# Altium PCB F407ZGT6.PcbDoc (part 5 of 7)
Units mil, origin at the board's own origin, x right, y up, seen from the top; angles counter-clockwise.
Board outline 4380 x 3940 mil, 2 copper layers (Top Layer, Bottom Layer); 88 components, 146 nets, 552 pads, 268 vias.
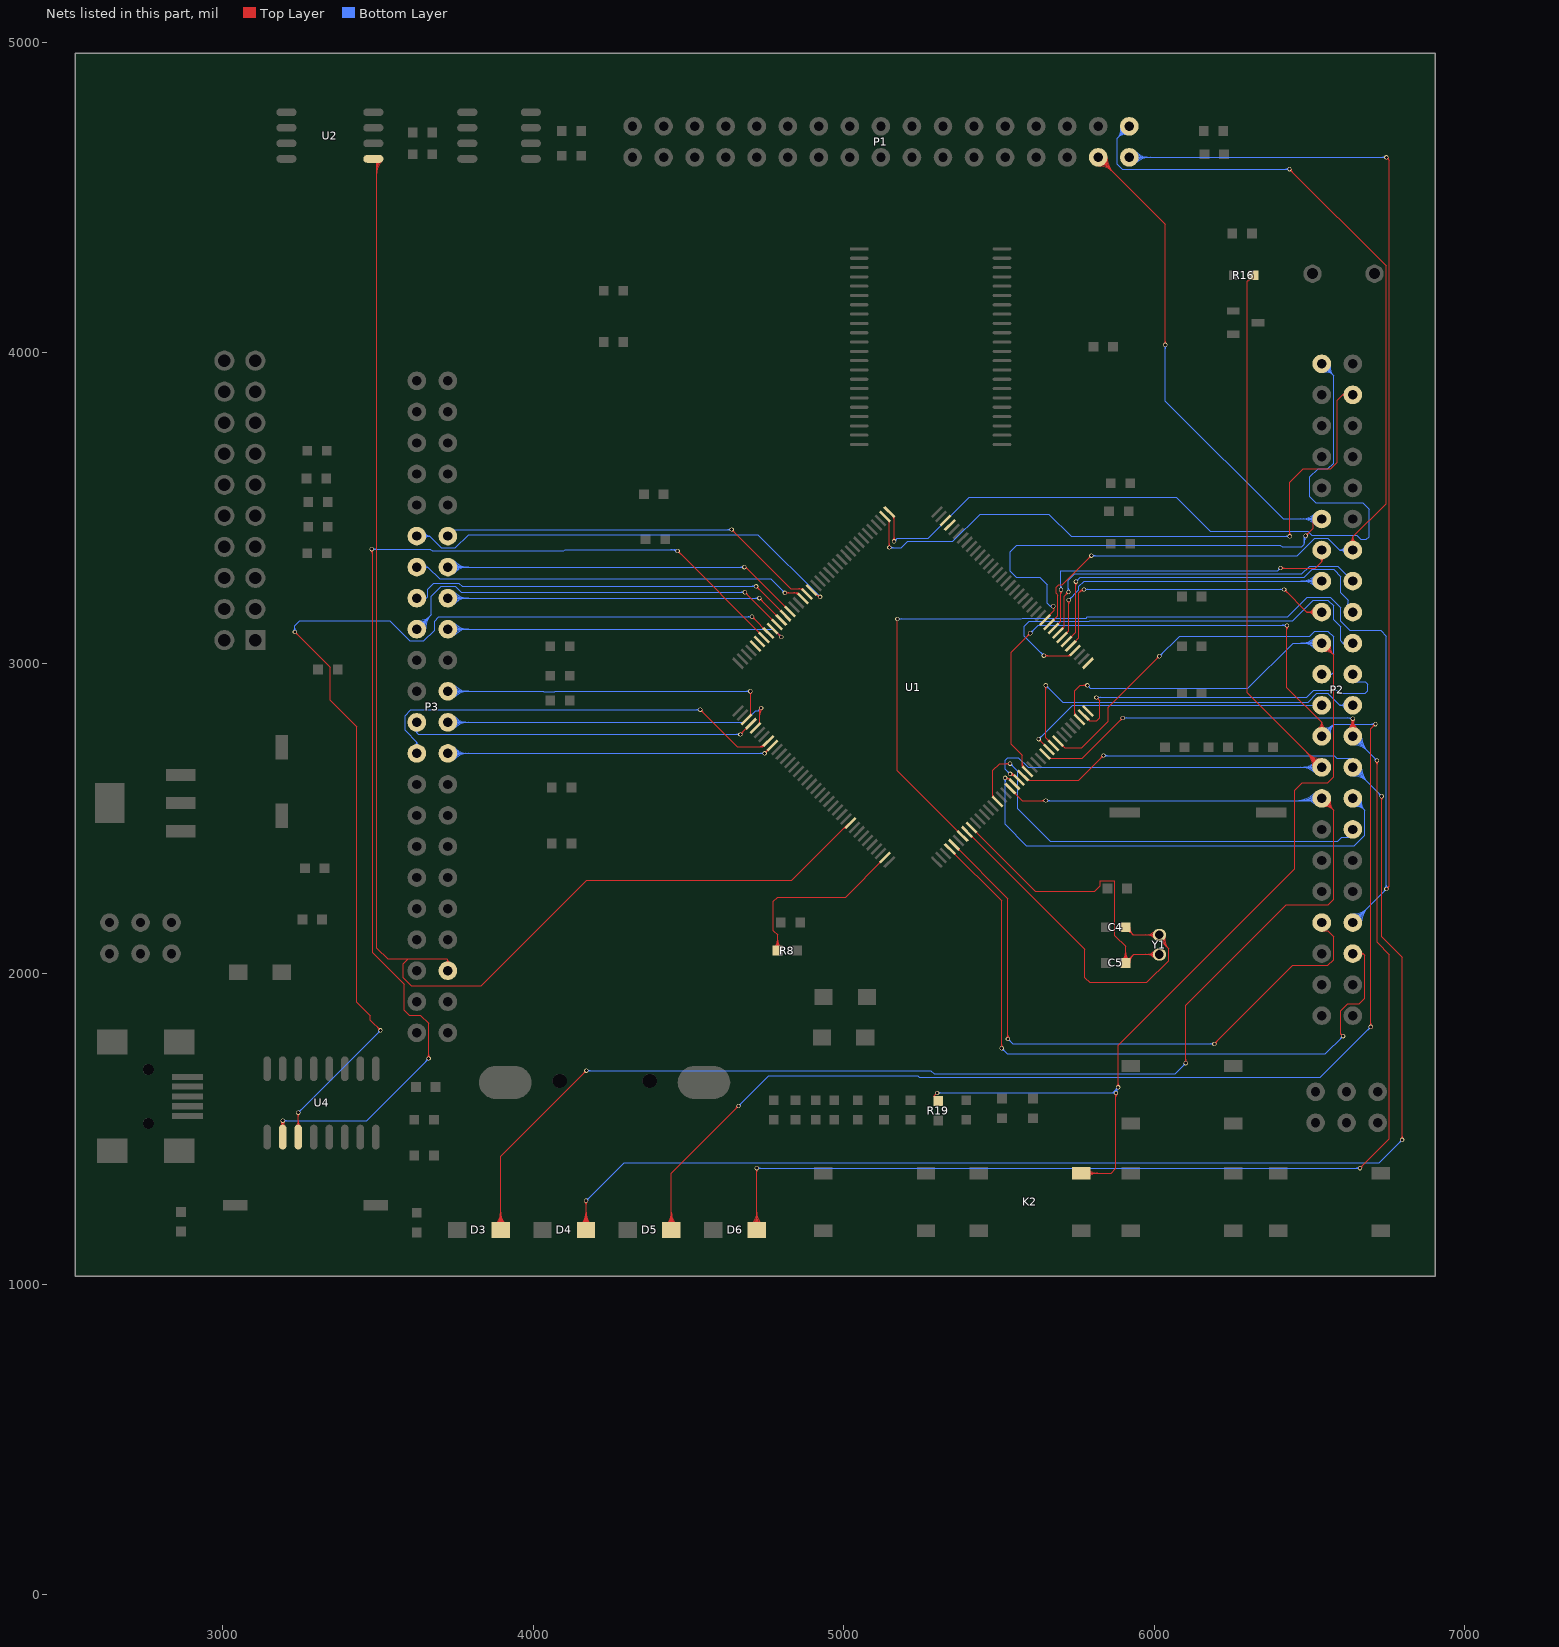
[diagram p5: the nets of this part, all layers, seen from the top]

## Via types
v1: diameter 14, hole 10, Top Layer to Bottom Layer, 265 vias
v2: diameter 150, hole 150, Top Layer to Bottom Layer, 3 vias

## Nets (pads, with @x,y where several pads share a name; then routed paths per layer and width w, separated by ;. In a path a pad name is that pad's centre, name@x,y a point inside that pad or via, vN(x,y) a via of type N, cw(c..) or ccw(c..) an arc to the next point about the centre after c; other vN are vias at no path point) (continued)
NetR8_2: R8.2 U1.143 | length 680.1
  Top Layer w4: R8.2@4777.29,2084.72 ccw(c4753.82,2108.19) 4787.01,2108.19 ccw(c4820.2,2108.19) R8.2@4796.73,2084.72 ; R8.2@4780.12,2081.89 ccw(c4763.47,2098.53) 4787.01,2098.53 ccw(c4810.54,2098.53) R8.2@4793.9,2081.89 ; R8.2@4787.01,2075 4787.01,2125 4773,2139.01 4773,2233 4787,2247 5006.05,2247 U1.143@5132.97,2373.92 ; U1.143@5117,2360.28 cw(c5111.37,2360.28) 5115.35,2356.3 cw(c5119.33,2352.32) U1.143@5119.33,2357.95
NRF_CE: P3.34 U1.91 | length 1581.4
  Top Layer w4: U1.91@4896.34,3236.92 4919.26,3214 v1(4924,3214) ; U1.91@4907.37,3225.89 ccw(c4924,3242.51) v1@4924,3219 ; U1.91@4909.98,3220.95 cw(c4909.98,3215.32) 4913.96,3219.3 cw(c4917.94,3223.28) U1.91@4912.31,3223.28 ; 4914.2,3219.06 ccw(c4924,3228.86) v1@4924,3215
  Bottom Layer w4: P3.34@3625,3410 3666,3410 ; P3.34@3647.35,3401.27 cw(c3660.14,3396.27) 3660.14,3410 cw(c3660.14,3423.73) P3.34@3647.35,3418.73 ; P3.34@3651.08,3399.81 cw(c3666,3393.98) 3666,3410 ; P3.34@3651.08,3420.19 ccw(c3666,3426.02) 3666,3410 ; v1@4919,3214 ccw(c4906.93,3214) 4915.46,3222.54 ccw(c4924,3231.07) v1@4924,3219 ; v1(4924,3214) 4723,3415 3792,3415 3749,3372 3704,3372 3666,3410
NRF_CS: P3.33 U1.92 | length 1328.5
  Top Layer w4: v1@4639,3426 cw(c4639,3413.93) 4647.54,3422.46 cw(c4656.07,3431) v1@4644,3431 ; v1(4639,3431) 4830,3240 4865.42,3240 ; 4855.05,3240 cw(c4855.05,3222.91) U1.92@4867.13,3234.99 ; 4864.7,3240 cw(c4864.7,3232.57) U1.92@4869.96,3237.82 ; U1.92@4866.47,3236.94 ccw(c4862.83,3237.41) 4865.42,3240 ; U1.92@4868.48,3238.95 cw(c4868.01,3242.59) 4865.42,3240 ; U1.92@4882.42,3223 4865.42,3240
  Bottom Layer w4: P3.33@3725,3410 3725,3431 v1(4639,3431) ; v1@4635.46,3427.46 ccw(c4626.93,3418.93) 4626.93,3431 ccw(c4626.93,3443.07) v1@4635.46,3434.54
NRF_IRQ: P3.32 U1.93 | length 1401.1
  Top Layer w4: v1(4810.58,3227) 4850.58,3227 U1.93@4868.5,3209.08 ; v1@4814.12,3223.46 cw(c4822.65,3214.93) 4822.65,3227 cw(c4822.65,3239.07) v1@4814.12,3230.54 ; 4838.91,3227 cw(c4838.91,3206.78) U1.93@4853.21,3221.08 ; 4848.57,3227 cw(c4848.57,3216.43) U1.93@4856.04,3223.91 ; U1.93@4852.53,3222.72 ccw(c4846.9,3222.72) 4850.88,3226.7 ccw(c4854.86,3230.68) U1.93@4854.86,3225.06
  Bottom Layer w4: P3.32@3625,3310 3661,3310 ; P3.32@3648.26,3304.09 cw(c3655.86,3302.16) 3655.86,3310 cw(c3655.86,3317.84) P3.32@3648.26,3315.91 ; P3.32@3652.14,3303.11 cw(c3661,3300.86) 3661,3310 ; P3.32@3652.14,3316.89 ccw(c3661,3319.14) 3661,3310 ; v1@4805.58,3227 ccw(c4793.51,3227) 4802.05,3235.54 ccw(c4810.58,3244.07) v1@4810.58,3232 ; v1(4810.58,3227) 4765.58,3272 3699,3272 3661,3310
PA0: K2.3 P2.26 R19.1 U1.34 | length 4688.7
  Top Layer w4: v1@5296,1616 cw(c5283.93,1616) 5292.46,1607.46 cw(c5301,1598.93) v1@5301,1611 ; v1(5301,1616) 5290,1605 R19.1@5305,1590 ; 5745,2840.3 ccw(c5753.01,2840.3) U1.34@5747.35,2834.63 ; U1.34@5759.34,2819.34 5745,2833.68 5745,2912 5762,2929 v1(5785,2929) ; K2.3@5765.35,1357.52 5861.52,1357.52 5877,1373 v1(5877,1616) ; v1@5781.46,2925.46 ccw(c5772.93,2916.93) 5772.93,2929 ccw(c5772.93,2941.07) v1@5781.46,2932.54 ; K2.3@5782.04,1350.67 cw(c5798.58,1334.14) 5798.58,1357.52 cw(c5798.58,1380.9) K2.3@5782.04,1364.37 ; K2.3@5784.87,1347.84 cw(c5808.23,1324.48) 5808.23,1357.52 cw(c5808.23,1390.56) K2.3@5784.87,1367.2 ; K2.3@5787.7,1345.01 cw(c5817.89,1314.82) 5817.89,1357.52 cw(c5817.89,1400.22) K2.3@5787.7,1370.03 ; v1@5873.46,1612.46 cw(c5864.93,1603.93) 5877,1603.93 cw(c5889.07,1603.93) v1@5880.54,1612.46 ; v1@5880.46,1637.54 ccw(c5871.93,1646.07) 5884,1646.07 ccw(c5896.07,1646.07) v1@5887.54,1637.54 ; v1(5884,1634) 5884,1770 6453,2339 6453,2592 6477,2616 6560,2616 6578,2634 6578,3027 ; P2.26@6540,3065 6578,3027 ; P2.26@6542.79,3049.25 cw(c6546.53,3028.11) 6561.71,3043.29 cw(c6576.89,3058.47) P2.26@6555.75,3062.21 ; P2.26@6543.49,3045.31 cw(c6548.17,3018.88) 6567.14,3037.86 cw(c6586.12,3056.83) P2.26@6559.69,3061.51 ; P2.26@6544.19,3041.37 cw(c6549.8,3009.66) 6572.57,3032.43 cw(c6595.34,3055.2) P2.26@6563.63,3060.81 ; P2.26@6544.88,3037.43 cw(c6551.43,3000.44) 6578,3027 ; P2.26@6567.57,3060.12 ccw(c6604.56,3053.57) 6578,3027
  Bottom Layer w4: v1(5301,1616) 5866,1616 ; v1@5304.54,1612.46 cw(c5313.07,1603.93) 5313.07,1616 cw(c5313.07,1628.07) v1@5304.54,1619.54 ; v1@5785,2924 cw(c5785,2911.93) 5793.54,2920.46 cw(c5802.07,2929) v1@5790,2929 ; v1(5785,2929) 5795,2919 6302,2919 6448,3065 P2.26@6540,3065 ; 5870.75,1612.85 cw(c5878.01,1616.51) 5872.26,1622.26 ; v1@5873.23,1612.71 ccw(c5866,1606.4) 5866,1616 ; v1@5873.23,1619.29 cw(c5866,1625.6) 5866,1616 ; v1@5874.32,1614.65 cw(c5883.22,1619.13) 5876.17,1626.17 ; 5876.62,1624.09 cw(c5885.22,1619.12) v1@5884.41,1629.02 ; v1(5877,1616) 5866,1616 ; v1@5877.89,1616.45 cw(c5888.42,1621.75) v1@5880.09,1630.09 ; 5878.45,1627.26 ccw(c5872.23,1630.85) v1@5879.17,1632.71 ; v1@5879,1634 cw(c5866.93,1634) 5875.46,1625.46 cw(c5884,1616.93) v1@5884,1629 ; v1@5881.47,1618.25 cw(c5893.63,1624.37) v1(5884,1634) 5866,1616 ; P2.26@6520.2,3045.2 ccw(c6472.4,2997.4) 6472.4,3065 ccw(c6472.4,3132.6) P2.26@6520.2,3084.8 ; P2.26@6523.03,3048.03 ccw(c6482.06,3007.06) 6482.06,3065 ccw(c6482.06,3122.94) P2.26@6523.03,3081.97 ; P2.26@6525.86,3050.86 ccw(c6491.72,3016.72) 6491.72,3065 ccw(c6491.72,3113.28) P2.26@6525.86,3079.14 ; P2.26@6528.69,3053.69 ccw(c6501.37,3026.37) 6501.37,3065 ccw(c6501.37,3103.63) P2.26@6528.69,3076.31
PA1: P2.23 U1.35 | length 1168.1
  Top Layer w4: U1.35@5773.26,2833.26 5791.52,2815 5815,2815 5825,2825 5825,2879 v1(5814,2890) ; U1.35@5786.9,2817.29 cw(c5786.9,2811.66) 5790.88,2815.64 cw(c5794.86,2819.62) U1.35@5789.23,2819.62 ; v1@5814,2885 cw(c5814,2872.93) 5822.54,2881.46 cw(c5831.07,2890) v1@5819,2890
  Bottom Layer w4: v1(5814,2890) 6492,2890 6515,2913 6588,2913 6598,2903 6680,2903 6688,2911 6688,2932 6680,2940 6640,2940 P2.23@6640,2965 ; v1@5817.54,2886.46 cw(c5826.07,2877.93) 5826.07,2890 cw(c5826.07,2902.07) v1@5817.54,2893.54
PA2: U1.36
PA3: U1.37
PA4: P2.25 U1.40 | length 1507.5
  Top Layer w4: v1(5645,3025) 5728.37,3025 ; v1@5648.54,3021.46 cw(c5657.07,3012.93) 5657.07,3025 cw(c5657.07,3037.07) v1@5648.54,3028.54 ; 5717.92,3025 ccw(c5717.92,3042.27) U1.40@5730.13,3030.06 ; 5727.58,3025 ccw(c5727.58,3032.61) U1.40@5732.96,3027.23 ; U1.40@5729.46,3028.14 cw(c5725.67,3027.7) 5728.37,3025 ; U1.40@5731.51,3026.09 ccw(c5731.07,3022.3) 5728.37,3025 ; U1.40@5745.42,3042.05 5728.37,3025
  Bottom Layer w4: v1@5640,3025 ccw(c5627.93,3025) 5636.46,3033.54 ccw(c5645,3042.07) v1@5645,3030 ; v1(5645,3025) 5582,3088 5582,3120 5597.94,3135.94 5790.94,3135.94 5792,3137 6446,3137 6512,3203 6560,3203 6578,3185 6578,3141 6601,3118 6601,3072 6608,3065 ; P2.25@6612.25,3061.28 ccw(c6608,3060.72) 6608,3065 ; P2.25@6612.25,3068.72 cw(c6608,3069.28) 6608,3065 ; P2.25@6640,3065 6608,3065
PA5: P2.28 U1.41 | length 1240.4
  Top Layer w4: U1.41@5731.5,3055.97 5758,3082.47 5758,3228 ; U1.41@5745.14,3071.94 ccw(c5745.14,3077.57) 5749.12,3073.59 ccw(c5753.1,3069.61) U1.41@5747.47,3069.61 ; 5763.63,3233.63 cw(c5772.11,3225.15) v1@5773.85,3237.01 ; v1@5773.27,3233.05 ccw(c5770.66,3215.34) 5758,3228 ; v1(5774,3238) 5768,3238 5758,3228 ; v1@6419,3233 cw(c6419,3220.93) 6427.54,3229.46 cw(c6436.07,3238) v1@6424,3238 ; v1(6419,3238) 6492,3165 ; P2.28@6515.63,3151.22 ccw(c6492,3137.86) 6492,3165 ; P2.28@6515.63,3178.78 cw(c6492,3192.14) 6492,3165 ; P2.28@6519.11,3153.19 ccw(c6498.86,3141.74) 6498.86,3165 ccw(c6498.86,3188.26) P2.28@6519.11,3176.81 ; P2.28@6522.59,3155.16 ccw(c6505.72,3145.61) 6505.72,3165 ccw(c6505.72,3184.39) P2.28@6522.59,3174.84 ; P2.28@6540,3165 6492,3165
  Bottom Layer w4: v1(5774,3238) v1(6419,3238) ; v1@5777.54,3234.46 cw(c5786.07,3225.93) 5786.07,3238 cw(c5786.07,3250.07) v1@5777.54,3241.54 ; v1@6415.46,3234.46 ccw(c6406.93,3225.93) 6406.93,3238 ccw(c6406.93,3250.07) v1@6415.46,3241.54
PA6: P2.27 U1.42 | length 1284.6
  Top Layer w4: U1.42@5717.58,3069.89 5748,3100.31 v1(5748,3263.35) ; U1.42@5731.22,3085.86 ccw(c5731.22,3091.49) 5735.2,3087.51 ccw(c5739.18,3083.53) U1.42@5733.55,3083.53 ; v1@5744.46,3259.81 cw(c5735.93,3251.28) 5748,3251.28 cw(c5760.07,3251.28) v1@5751.54,3259.81
  Bottom Layer w4: v1(5748,3263.35) 5761.65,3277 6483,3277 6509,3303 6578,3303 6602,3279 6602,3227 6625,3204 6625,3165 P2.27@6640,3165 ; v1@5748,3268.35 ccw(c5748,3280.42) 5756.54,3271.88 ccw(c5765.07,3263.35) v1@5753,3263.35 ; P2.27@6620.2,3184.8 ccw(c6608.62,3196.38) 6625,3196.38
PA7: P2.30 U1.43 | length 1356.2
  Top Layer w4: U1.43@5703.66,3083.81 5725,3105.15 v1(5725,3204) ; U1.43@5717.3,3099.78 ccw(c5717.3,3105.41) 5721.28,3101.43 ccw(c5725.26,3097.45) U1.43@5719.63,3097.45 ; v1@5721.46,3200.46 cw(c5712.93,3191.93) 5725,3191.93 cw(c5737.07,3191.93) v1@5728.54,3200.46
  Bottom Layer w4: v1(5725,3204) 5758,3237 5758,3248 5775,3265 P2.30@6540,3265 ; v1@5725,3209 ccw(c5725,3221.07) 5733.54,3212.54 ccw(c5742.07,3204) v1@5730,3204 ; P2.30@6520.2,3245.2 ccw(c6472.4,3197.4) 6472.4,3265 ccw(c6472.4,3332.6) P2.30@6520.2,3284.8 ; P2.30@6523.03,3248.03 ccw(c6482.06,3207.06) 6482.06,3265 ccw(c6482.06,3322.94) P2.30@6523.03,3281.97 ; P2.30@6525.86,3250.86 ccw(c6491.72,3216.72) 6491.72,3265 ccw(c6491.72,3313.28) P2.30@6525.86,3279.14 ; P2.30@6528.69,3253.69 ccw(c6501.37,3226.37) 6501.37,3265 ccw(c6501.37,3303.63) P2.30@6528.69,3276.31
PA8: P3.27 U1.100 | length 1501.8
  Top Layer w4: U1.100@4771.06,3111.65 4772.35,3111.65 v1(4799,3085) ; U1.100@4784.7,3095.68 cw(c4784.7,3086.94) 4790.88,3093.12 ; v1@4794,3085 ccw(c4781.93,3085) 4790.46,3093.54 ccw(c4799,3102.07) v1@4799,3090
  Bottom Layer w4: P3.27@3725,3110 4774,3110 v1(4799,3085) ; P3.27@3736.31,3098.69 cw(c3763.63,3071.37) 3763.63,3110 cw(c3763.63,3148.63) P3.27@3736.31,3121.31 ; P3.27@3739.14,3095.86 cw(c3773.28,3061.72) 3773.28,3110 cw(c3773.28,3158.28) P3.27@3739.14,3124.14 ; P3.27@3741.97,3093.03 cw(c3782.94,3052.06) 3782.94,3110 cw(c3782.94,3167.94) P3.27@3741.97,3126.97 ; P3.27@3744.8,3090.2 cw(c3792.6,3042.4) 3792.6,3110 cw(c3792.6,3177.6) P3.27@3744.8,3129.8 ; v1@4794,3085 ccw(c4781.93,3085) 4790.46,3093.54 ccw(c4799,3102.07) v1@4799,3090
PA9: U1.101 U4.3 | length 3722
  Top Layer w4: v1@3232,3096 cw(c3232,3083.93) 3240.54,3092.46 cw(c3249.07,3101) v1@3237,3101 ; v1(3232,3101) 3346,2987 3346,2881 3431,2796 3431,1909 3475.74,1864.26 3475.74,1850 v1(3508.03,1817.71) ; U4.3@3235.93,1509.07 ccw(c3218.86,1526.14) 3243,1526.14 ccw(c3267.14,1526.14) U4.3@3250.07,1509.07 ; U4.3@3238.76,1506.24 ccw(c3228.51,1516.49) 3243,1516.49 ccw(c3257.49,1516.49) U4.3@3247.24,1506.24 ; v1@3239.46,1549.14 cw(c3230.93,1540.6) 3243,1540.6 cw(c3255.07,1540.6) v1@3246.54,1549.14 ; U4.3@3243,1474 v1(3243,1552.67) ; v1@3503.03,1817.71 ccw(c3490.96,1817.71) 3499.5,1826.24 ccw(c3508.03,1834.78) v1@3508.03,1822.71 ; v1@4704.87,3145 cw(c4704.87,3132.93) 4713.41,3141.46 cw(c4721.94,3150) v1@4709.87,3150 ; v1(4704.87,3150) U1.101@4757.14,3097.73 ; U1.101@4741.17,3111.37 ccw(c4735.55,3111.37) 4739.52,3115.35 ccw(c4743.5,3119.33) U1.101@4743.5,3113.7
  Bottom Layer w4: v1@3228.46,3104.54 ccw(c3219.93,3113.07) 3232,3113.07 ccw(c3244.07,3113.07) v1@3235.54,3104.54 ; v1(3232,3101) 3232,3121 3248,3137 3538,3137 3603,3072 3647,3072 3682,3107 3682,3136 3696,3150 v1(4704.87,3150) ; v1(3243,1552.67) v1(3508.03,1817.71) ; v1@3243,1557.67 ccw(c3243,1569.74) 3251.54,1561.21 ccw(c3260.07,1552.67) v1@3248,1552.67 ; v1@3503.03,1817.71 cw(c3490.96,1817.71) 3499.5,1809.17 cw(c3508.03,1800.63) v1@3508.03,1812.71 ; v1@4701.34,3146.46 ccw(c4692.8,3137.93) 4692.8,3150 ccw(c4692.8,3162.07) v1@4701.34,3153.54
PA10: U1.102 U4.2 | length 4010.4
  Top Layer w4: U4.2@3185.93,1509.07 ccw(c3168.86,1526.14) 3193,1526.14 ccw(c3217.14,1526.14) U4.2@3200.07,1509.07 ; v1@3188.67,1524.5 cw(c3177.56,1518.09) 3189.95,1514.76 ; U4.2@3188.76,1506.24 ccw(c3178.51,1516.49) 3193,1516.49 ccw(c3207.49,1516.49) U4.2@3197.24,1506.24 ; v1@3189.46,1523.46 cw(c3180.93,1514.93) 3193,1514.93 cw(c3205.07,1514.93) v1@3196.54,1523.46 ; 3190.23,1515.8 cw(c3201.16,1512.87) v1@3195.5,1522.67 ; v1@3190.5,1522.67 cw(c3184.84,1512.87) 3195.77,1515.8 ; U4.2@3193,1474 v1(3193,1527) ; 3196.05,1514.76 cw(c3208.44,1518.09) v1@3197.33,1524.5 ; v1@3476.46,3364.46 cw(c3460.69,3348.69) 3483,3348.69 ; v1@3479.29,3367.29 cw(c3470.34,3358.34) 3483,3358.34 ; v1(3480,3368) 3483,3365 3483,2067 3584,1966 3584,1883 3600,1867 3636,1867 3663,1840 v1(3663,1727) ; v1@3659.46,1730.54 ccw(c3650.93,1739.07) 3663,1739.07 ccw(c3675.07,1739.07) v1@3666.54,1730.54 ; v1@4465.03,3357 cw(c4465.03,3344.93) 4473.57,3353.46 cw(c4482.1,3362) v1@4470.03,3362 ; v1(4465.03,3362) U1.102@4743.22,3083.81 ; U1.102@4727.25,3097.45 ccw(c4721.63,3097.45) 4725.6,3101.43 ccw(c4729.58,3105.41) U1.102@4729.58,3099.78
  Bottom Layer w4: v1(3193,1527) 3463,1527 v1(3663,1727) ; v1@3196.54,1523.46 cw(c3205.07,1514.93) 3205.07,1527 cw(c3205.07,1539.07) v1@3196.54,1530.54 ; v1(3480,3368) 3668,3368 3674,3362 4098.92,3362 4103.06,3366.14 4460.89,3366.14 v1(4465.03,3362) ; v1@3483.54,3364.46 cw(c3492.07,3355.93) 3492.07,3368 cw(c3492.07,3380.07) v1@3483.54,3371.54 ; v1@3658,1727 cw(c3645.93,1727) 3654.46,1718.46 cw(c3663,1709.93) v1@3663,1722 ; 4442.96,3366.14 cw(c4442.96,3339.93) v1@4461.5,3358.46 ; 4452.62,3366.14 cw(c4452.62,3349.59) v1@4464.32,3361.29
PA11: U1.103
PA12: U1.104
PB0: P1.34 P2.31 U1.46 | length 3734.3
  Top Layer w4: U1.46@5661.9,3125.57 5690,3153.66 5690,3219 5684,3225 5684,3245.38 5692.4,3253.79 5704.79,3253.79 v1(5798,3347) ; U1.46@5675.55,3141.54 ccw(c5675.55,3147.17) 5679.52,3143.19 ccw(c5683.5,3139.21) U1.46@5677.88,3139.21 ; v1@5793,3347 cw(c5780.93,3347) 5789.46,3338.46 cw(c5798,3329.93) v1@5798,3342 ; v1@6436,4587 cw(c6436,4574.93) 6444.54,4583.46 cw(c6453.07,4592) v1@6441,4592 ; v1(6436,4592) 6747.53,4280.47 6747.53,3514.53 6640,3407 ; P2.31@6629.23,3390.85 ccw(c6622.5,3407) 6640,3407 ; P2.31@6630.77,3387.15 ccw(c6625,3401) 6640,3401 ccw(c6655,3401) P2.31@6649.23,3387.15 ; P2.31@6640,3365 6640,3407 ; P2.31@6650.77,3390.85 cw(c6657.5,3407) 6640,3407
  Bottom Layer w4: v1(5798,3347) 6461,3347 6517,3403 6560,3403 6598,3365 ; v1@5801.54,3343.46 cw(c5810.07,3334.93) 5810.07,3347 cw(c5810.07,3359.07) v1@5801.54,3350.54 ; P1.34@5892.43,4725.12 cw(c5855.44,4718.57) 5882,4692 ; P1.34@5896.37,4725.81 cw(c5864.66,4720.2) 5887.43,4697.43 cw(c5910.2,4674.66) P1.34@5915.81,4706.37 ; P1.34@5900.31,4726.51 cw(c5873.88,4721.83) 5892.86,4702.86 cw(c5911.83,4683.88) P1.34@5916.51,4710.31 ; P1.34@5904.25,4727.21 cw(c5883.11,4723.47) 5898.29,4708.29 cw(c5913.47,4693.11) P1.34@5917.21,4714.25 ; P1.34@5915.12,4702.43 ccw(c5908.57,4665.44) 5882,4692 ; P1.34@5920,4730 5882,4692 ; v1@6432.46,4588.46 ccw(c6423.93,4579.93) 6423.93,4592 ccw(c6423.93,4604.07) v1@6432.46,4595.54 ; v1(6436,4592) 5898,4592 5882,4608 5882,4692 ; P2.31@6614.15,3354.23 ccw(c6598,3347.5) 6598,3365 ; P2.31@6614.15,3375.77 cw(c6598,3382.5) 6598,3365 ; P2.31@6617.85,3355.77 ccw(c6604,3350) 6604,3365 ccw(c6604,3380) P2.31@6617.85,3374.23 ; P2.31@6640,3365 6598,3365
PB1: P1.31 P2.34 U1.47 | length 3768.3
  Top Layer w4: U1.47@5647.98,3139.49 5679,3170.5 5679,3180 v1(5675,3184) ; U1.47@5661.62,3155.46 ccw(c5661.62,3161.08) 5665.6,3157.11 ccw(c5669.58,3153.13) U1.47@5663.96,3153.13 ; v1@5672.9,3179.46 cw(c5668.49,3169.92) 5679,3169.92 ; v1@5674.58,3183.09 cw(c5671.38,3176.18) 5679,3176.18 ; P1.31@5820,4602 cw(c5820,4534.4) 5867.8,4582.2 cw(c5915.6,4630) P1.31@5848,4630 ; P1.31@5820,4606 cw(c5820,4548.06) 5860.97,4589.03 cw(c5901.94,4630) P1.31@5844,4630 ; P1.31@5820,4610 cw(c5820,4561.72) 5854.14,4595.86 cw(c5888.28,4630) P1.31@5840,4630 ; P1.31@5820,4614 cw(c5820,4575.37) 5847.31,4602.69 cw(c5874.63,4630) P1.31@5836,4630 ; P1.31@5820,4630 6036,4414 v1(6036,4026) ; v1@6032.46,4029.54 ccw(c6023.93,4038.07) 6036,4038.07 ccw(c6048.07,4038.07) v1@6039.54,4029.54 ; v1(6488,3411) 6512,3435 6512,3465 P2.34@6540,3465 ; v1@6488,3416 ccw(c6488,3428.07) 6496.54,3419.54 ccw(c6505.07,3411) v1@6493,3411
  Bottom Layer w4: v1@5671,3181 ccw(c5665,3176.5) 5665,3184 ; v1@5671,3187 cw(c5665,3191.5) 5665,3184 ; v1(5675,3184) 5665,3184 ; v1@6032.46,4022.46 cw(c6023.93,4013.93) 6036,4013.93 cw(c6048.07,4013.93) v1@6039.54,4022.46 ; v1(6036,4026) 6036,3845 6416,3465 P2.34@6540,3465 ; 6483,3386.86 cw(c6512.14,3386.86) v1@6491.54,3407.46 ; 6483,3396.51 cw(c6502.49,3396.51) v1@6488.71,3410.29 ; v1(6488,3411) 6483,3411 6483,3384 6475,3376 6412,3376 6407,3381 5558,3381 5537,3360 5537,3296 5556,3277 5632,3277 5656,3253 5656,3193 5665,3184 ; P2.34@6520.2,3445.2 ccw(c6472.4,3397.4) 6472.4,3465 ccw(c6472.4,3532.6) P2.34@6520.2,3484.8 ; P2.34@6523.03,3448.03 ccw(c6482.06,3407.06) 6482.06,3465 ccw(c6482.06,3522.94) P2.34@6523.03,3481.97 ; P2.34@6525.86,3450.86 ccw(c6491.72,3416.72) 6491.72,3465 ccw(c6491.72,3513.28) P2.34@6525.86,3479.14 ; P2.34@6528.69,3453.69 ccw(c6501.37,3426.37) 6501.37,3465 ccw(c6501.37,3503.63) P2.34@6528.69,3476.31
PB5: P3.5 U1.135 U2.5 | length 4738
  Top Layer w4: U2.5@3485,4625 3496,4625 3496,2083 3531,2048 3598,2048 ; 3496,4577.92 cw(c3552.08,4577.92) U2.5@3512.42,4617.58 ; 3496,4587.58 cw(c3542.42,4587.58) U2.5@3509.6,4620.4 ; 3496,4597.24 cw(c3532.76,4597.24) U2.5@3506.77,4623.23 ; 3496,4606.89 cw(c3523.11,4606.89) U2.5@3503.94,4626.06 ; P3.5@3719.63,2037.48 ccw(c3718.36,2044) 3725,2044 ; P3.5@3725,2010 3725,2044 ; P3.5@3730.37,2037.48 cw(c3731.64,2044) 3725,2044 ; 4994.82,2463.85 cw(c5007.97,2450.7) U1.135@5007.97,2469.3 ; 5001.65,2470.68 cw(c5007.97,2464.36) U1.135@5007.97,2473.3 ; U1.135@5021.61,2485.27 5016.24,2485.27 4831.96,2301 4172,2301 3832,1961 3607.79,1961 3582,1986.79 3582,2032 3598,2048 ; 3598,2048 3721,2048 3725,2044
PB10: U1.69
PB11: U1.70
PB12: P2.44 U1.73 | length 2814.2
  Top Layer w4: U1.73@5146.89,3487.47 U1.73@5159.36,3475 ; v1@5158.72,3396.54 ccw(c5150.19,3405.07) 5162.26,3405.07 ccw(c5174.33,3405.07) v1@5165.8,3396.54 ; U1.73@5158.88,3472.18 cw(c5150.72,3464.02) 5162.26,3464.02 ; v1(5162.26,3393) U1.73@5162.26,3475
  Bottom Layer w4: v1(5162.26,3393) 5172.26,3403 5272.89,3403 5404.89,3535 6072,3535 6181,3426 6495,3426 6508,3413 6652,3413 6666,3399 6684,3399 6693,3408 6693,3497 6672,3518 6520,3518 6502,3536 6502,3601 6528,3627 6560,3627 6578,3645 6578,3927 ; v1@5162.26,3398 ccw(c5162.26,3410.07) 5170.8,3401.54 ccw(c5179.33,3393) v1@5167.26,3393 ; P2.44@6540,3965 6578,3927 ; P2.44@6542.79,3949.25 cw(c6546.53,3928.11) 6561.71,3943.29 cw(c6576.89,3958.47) P2.44@6555.75,3962.21 ; P2.44@6543.49,3945.31 cw(c6548.17,3918.88) 6567.14,3937.86 cw(c6586.12,3956.83) P2.44@6559.69,3961.51 ; P2.44@6544.19,3941.37 cw(c6549.8,3909.66) 6572.57,3932.43 cw(c6595.34,3955.2) P2.44@6563.63,3960.81 ; P2.44@6544.88,3937.43 cw(c6551.43,3900.44) 6578,3927 ; P2.44@6567.57,3960.12 ccw(c6604.56,3953.57) 6578,3927
PB13: P2.41 U1.74 | length 2178.9
  Top Layer w4: U1.74@5132.97,3473.55 5147,3459.52 v1(5147,3373) ; v1@5143.46,3376.54 ccw(c5134.93,3385.07) 5147,3385.07 ccw(c5159.07,3385.07) v1@5150.54,3376.54 ; U1.74@5144.96,3458.26 cw(c5140.04,3453.34) 5147,3453.34 ; U1.74@5147,3455.23 cw(c5151.29,3455.23) U1.74@5148.26,3458.26 ; v1@6433.46,3412.54 ccw(c6424.93,3421.07) 6437,3421.07 ccw(c6449.07,3421.07) v1@6440.54,3412.54 ; v1(6437,3409) 6437,3584 6480,3627 6569,3627 6590,3648 6590,3847 6608,3865 ; P2.41@6612.25,3861.28 ccw(c6608,3860.72) 6608,3865 ; P2.41@6612.25,3868.72 cw(c6608,3869.28) 6608,3865 ; P2.41@6640,3865 6608,3865
  Bottom Layer w4: v1(5147,3373) 5186,3373 5206,3393 5352,3393 5440,3481 5661,3481 5733,3409 v1(6437,3409) ; v1@5150.54,3369.46 cw(c5159.07,3360.93) 5159.07,3373 cw(c5159.07,3385.07) v1@5150.54,3376.54 ; v1@6433.46,3405.46 ccw(c6424.93,3396.93) 6424.93,3409 ccw(c6424.93,3421.07) v1@6433.46,3412.54
PC0: D6.2 P2.19 U1.26 | length 5827.5
  Top Layer w4: D6.2@4703.32,1191.68 ccw(c4663.05,1231.95) 4720,1231.95 ccw(c4776.95,1231.95) D6.2@4736.68,1191.68 ; D6.2@4706.15,1188.85 ccw(c4672.7,1222.3) 4720,1222.3 ccw(c4767.3,1222.3) D6.2@4733.85,1188.85 ; D6.2@4708.98,1186.02 ccw(c4682.36,1212.64) 4720,1212.64 ccw(c4757.64,1212.64) D6.2@4731.02,1186.02 ; D6.2@4711.8,1183.2 ccw(c4692.02,1202.98) 4720,1202.98 ccw(c4747.98,1202.98) D6.2@4728.2,1183.2 ; v1@4716.46,1370.46 cw(c4707.93,1361.93) 4720,1361.93 cw(c4732.07,1361.93) v1@4723.54,1370.46 ; D6.2@4720,1175 v1(4720,1374) ; U1.26@5647.98,2707.98 5661.97,2694 5768.98,2694 v1(5898.98,2824) ; U1.26@5663.27,2692.69 cw(c5666.42,2689.54) U1.26@5666.42,2694 ; U1.26@5663.27,2695.99 ccw(c5668.08,2700.8) 5668.08,2694 ; v1@5893.98,2824 cw(c5881.9,2824) 5890.44,2815.46 cw(c5898.98,2806.93) v1@5898.98,2819 ; P2.19@6622.89,2787.16 ccw(c6595.99,2822) v1(6640,2822) ; P2.19@6625.33,2784 ccw(c6602.27,2813.86) 6640,2813.86 ccw(c6677.73,2813.86) P2.19@6654.67,2784 ; P2.19@6627.78,2780.83 ccw(c6608.56,2805.71) 6640,2805.71 ccw(c6671.44,2805.71) P2.19@6652.22,2780.83 ; P2.19@6630.22,2777.66 ccw(c6614.85,2797.57) 6640,2797.57 ccw(c6665.15,2797.57) P2.19@6649.78,2777.66 ; v1@6635.78,2819.31 cw(c6625.6,2812.82) 6637.39,2810.21 cw(c6649.18,2807.61) v1@6642.69,2817.78 ; v1@6636.46,2818.46 cw(c6627.93,2809.93) 6640,2809.93 cw(c6652.07,2809.93) v1@6643.54,2818.46 ; v1@6637.31,2817.78 cw(c6630.82,2807.61) 6642.61,2810.22 cw(c6654.4,2812.82) v1@6644.22,2819.31 ; P2.19@6640,2765 v1(6640,2822) ; P2.19@6657.11,2787.16 cw(c6684.01,2822) v1(6640,2822) ; v1(6663,1374) 6758,1469 6758,2061 6718,2101 v1(6718,2687) ; v1@6663,1379 ccw(c6663,1391.07) 6671.54,1382.54 ccw(c6680.07,1374) v1@6668,1374 ; v1@6714.46,2683.46 cw(c6705.93,2674.93) 6718,2674.93 cw(c6730.07,2674.93) v1@6721.54,2683.46
  Bottom Layer w4: v1(4720,1374) v1(6663,1374) ; v1@4723.54,1370.46 cw(c4732.07,1361.93) 4732.07,1374 cw(c4732.07,1386.07) v1@4723.54,1377.54 ; v1(5898.98,2824) 6638,2824 v1(6640,2822) ; v1@5902.51,2820.46 cw(c5911.05,2811.93) 5911.05,2824 cw(c5911.05,2836.07) v1@5902.51,2827.54 ; 6623.1,2824 cw(c6623.1,2805.1) v1@6636.46,2818.46 ; v1@6636.46,2825.54 cw(c6632.76,2829.24) 6632.76,2824 cw(c6632.76,2814.76) v1@6639.29,2821.29 ; P2.19@6640,2737 cw(c6640,2669.4) 6687.8,2717.2 cw(c6735.6,2765) P2.19@6668,2765 ; P2.19@6640,2741 cw(c6640,2683.06) 6680.97,2724.03 cw(c6721.94,2765) P2.19@6664,2765 ; P2.19@6640,2745 cw(c6640,2696.72) 6674.14,2730.86 cw(c6708.28,2765) P2.19@6660,2765 ; P2.19@6640,2749 cw(c6640,2710.37) 6667.31,2737.69 cw(c6694.63,2765) P2.19@6656,2765 ; P2.19@6640,2765 v1(6718,2687) ; v1@6659.46,1370.46 ccw(c6650.93,1361.93) 6650.93,1374 ccw(c6650.93,1386.07) v1@6659.46,1377.54 ; v1@6713,2687 ccw(c6700.93,2687) 6709.46,2695.54 ccw(c6718,2704.07) v1@6718,2692
PC1: P2.22 U1.27 | length 1051.9
  Top Layer w4: v1@5628,2750.81 cw(c5628,2738.74) 5636.54,2747.27 cw(c5645.07,2755.81) v1@5633,2755.81 ; v1(5628,2755.81) U1.27@5661.9,2721.9 ; U1.27@5645.93,2735.55 ccw(c5640.31,2735.55) 5644.28,2739.52 ccw(c5648.26,2743.5) U1.27@5648.26,2737.88
  Bottom Layer w4: v1(5628,2755.81) 5737.19,2865 P2.22@6540,2865 ; v1@5628,2760.81 ccw(c5628,2772.88) 5636.54,2764.34 ccw(c5645.07,2755.81) v1@5633,2755.81
PC2: P2.21 U1.28 | length 1365.4
  Top Layer w4: v1@5647.46,2925.46 cw(c5638.93,2916.93) 5651,2916.93 cw(c5663.07,2916.93) v1@5654.54,2925.46 ; v1(5651,2929) 5651,2760.65 U1.28@5675.82,2735.82 ; U1.28@5659.85,2749.47 ccw(c5654.23,2749.47) 5658.2,2753.44 ccw(c5662.18,2757.42) U1.28@5662.18,2751.8
  Bottom Layer w4: v1@5651,2924 cw(c5651,2911.93) 5659.54,2920.46 cw(c5668.07,2929) v1@5656,2929 ; v1(5651,2929) 5705,2875 6496.26,2875 6524.26,2903 6560,2903 6598,2865 ; P2.21@6614.15,2854.23 ccw(c6598,2847.5) 6598,2865 ; P2.21@6614.15,2875.77 cw(c6598,2882.5) 6598,2865 ; P2.21@6617.85,2855.77 ccw(c6604,2850) 6604,2865 ccw(c6604,2880) P2.21@6617.85,2874.23 ; P2.21@6640,2865 6598,2865
PC3: P2.24 U1.29 | length 1299.7
  Top Layer w4: U1.29@5689.74,2749.74 5711.49,2728 5766.53,2728 5852,2813.47 5852,2858 v1(6017,3023) ; U1.29@5703.39,2733.77 cw(c5703.39,2728.15) 5707.36,2732.12 cw(c5711.34,2736.1) U1.29@5705.72,2736.1 ; v1@6012,3023 cw(c5999.93,3023) 6008.46,3014.46 cw(c6017,3005.93) v1@6017,3018
  Bottom Layer w4: v1(6017,3023) 6082,3088 6502,3088 6517,3103 6560,3103 6578,3085 6578,2971 6572,2965 ; v1@6017,3028 ccw(c6017,3040.07) 6025.54,3031.54 ccw(c6034.07,3023) v1@6022,3023 ; P2.24@6540,2965 6572,2965 ; P2.24@6567.75,2961.28 cw(c6572,2960.72) 6572,2965 ; P2.24@6567.75,2968.72 ccw(c6572,2969.28) 6572,2965
PC4: P2.29 U1.44 | length 1185.7
  Top Layer w4: U1.44@5689.74,3097.73 5710,3117.98 5710,3215.65 v1(5724,3229.65) ; U1.44@5703.39,3113.7 ccw(c5703.39,3119.33) 5707.36,3115.35 ccw(c5711.34,3111.37) U1.44@5705.72,3111.37 ; v1@5719,3229.65 cw(c5706.93,3229.65) 5715.46,3221.12 cw(c5724,3212.58) v1@5724,3224.65
  Bottom Layer w4: v1@5720.46,3233.19 ccw(c5711.93,3241.72) 5724,3241.72 ccw(c5736.07,3241.72) v1@5727.54,3233.19 ; v1(5724,3229.65) 5724,3268 5744,3288 6476,3288 6501,3313 6592,3313 P2.29@6640,3265
PC5: P2.32 U1.45 | length 1219.5
  Top Layer w4: U1.45@5675.82,3111.65 5700,3135.82 v1(5700,3237) ; U1.45@5689.47,3127.62 ccw(c5689.47,3133.25) 5693.44,3129.27 ccw(c5697.42,3125.29) U1.45@5691.8,3125.29 ; v1@5696.46,3233.46 cw(c5687.93,3224.93) 5700,3224.93 cw(c5712.07,3224.93) v1@5703.54,3233.46 ; v1(6407,3307) 6519,3307 6540,3328 ; v1@6410.54,3303.46 cw(c6419.07,3294.93) 6419.07,3307 cw(c6419.07,3319.07) v1@6410.54,3310.54 ; P2.32@6532.39,3338.05 cw(c6529.56,3328) 6540,3328 ; P2.32@6533.48,3341.9 cw(c6531.05,3333.29) 6540,3333.29 cw(c6548.95,3333.29) P2.32@6546.52,3341.9 ; P2.32@6540,3365 6540,3328 ; P2.32@6547.61,3338.05 ccw(c6550.44,3328) 6540,3328
  Bottom Layer w4: v1@5696.46,3240.54 ccw(c5687.93,3249.07) 5700,3249.07 ccw(c5712.07,3249.07) v1@5703.54,3240.54 ; v1(5700,3237) 5700,3299 6399,3299 ; v1@6402.01,3306.77 cw(c6391.72,3306.28) 6399,3299 ; v1@6406.77,3302.01 ccw(c6406.28,3291.72) 6399,3299 ; v1(6407,3307) 6399,3299
PC6: P3.31 U1.96 | length 1549.2
  Top Layer w4: v1@4680,3305 cw(c4680,3283.11) 4695.48,3298.59 ; v1@4680,3309 cw(c4680,3296.77) 4688.65,3305.42 ; v1(4680,3310) 4684.07,3310 U1.96@4826.74,3167.33 ; U1.96@4810.77,3180.97 ccw(c4805.14,3180.97) 4809.12,3184.95 ccw(c4813.1,3188.92) U1.96@4813.1,3183.3
  Bottom Layer w4: P3.31@3725,3310 v1(4680,3310) ; P3.31@3736.31,3298.69 cw(c3763.63,3271.37) 3763.63,3310 cw(c3763.63,3348.63) P3.31@3736.31,3321.31 ; P3.31@3739.14,3295.86 cw(c3773.28,3261.72) 3773.28,3310 cw(c3773.28,3358.28) P3.31@3739.14,3324.14 ; P3.31@3741.97,3293.03 cw(c3782.94,3252.06) 3782.94,3310 cw(c3782.94,3367.94) P3.31@3741.97,3326.97 ; P3.31@3744.8,3290.2 cw(c3792.6,3242.4) 3792.6,3310 cw(c3792.6,3377.6) P3.31@3744.8,3329.8 ; v1@4676.46,3306.46 ccw(c4667.93,3297.93) 4667.93,3310 ccw(c4667.93,3322.07) v1@4676.46,3313.54
PC7: P3.30 U1.97 | length 1321.1
  Top Layer w4: v1@4718.23,3243 cw(c4718.23,3230.93) 4726.76,3239.46 cw(c4735.3,3248) v1@4723.23,3248 ; v1(4718.23,3248) U1.97@4812.82,3153.41 ; U1.97@4796.85,3167.05 ccw(c4791.22,3167.05) 4795.2,3171.03 ccw(c4799.18,3175) U1.97@4799.18,3169.38
  Bottom Layer w4: P3.30@3625,3210 3656,3210 ; P3.30@3652.86,3207.16 cw(c3656,3206.84) 3656,3210 ; P3.30@3652.86,3212.84 ccw(c3656,3213.16) 3656,3210 ; v1@4714.69,3244.46 ccw(c4706.15,3235.93) 4706.15,3248 ccw(c4706.15,3260.07) v1@4714.69,3251.54 ; v1(4718.23,3248) 3770.65,3248 3760.65,3258 3680,3258 3660.85,3238.85 3660.85,3214.85 3656,3210
PC8: P3.29 U1.98 | length 1483.6
  Top Layer w4: v1@4728.39,3205 cw(c4728.39,3192.93) 4736.92,3201.46 cw(c4745.46,3210) v1@4733.39,3210 ; v1(4728.39,3210) U1.98@4798.9,3139.49 ; U1.98@4782.93,3153.13 ccw(c4777.3,3153.13) 4781.28,3157.11 ccw(c4785.26,3161.08) U1.98@4785.26,3155.46
  Bottom Layer w4: P3.29@3725,3210 v1(4728.39,3210) ; P3.29@3736.31,3198.69 cw(c3763.63,3171.37) 3763.63,3210 cw(c3763.63,3248.63) P3.29@3736.31,3221.31 ; P3.29@3739.14,3195.86 cw(c3773.28,3161.72) 3773.28,3210 cw(c3773.28,3258.28) P3.29@3739.14,3224.14 ; P3.29@3741.97,3193.03 cw(c3782.94,3152.06) 3782.94,3210 cw(c3782.94,3267.94) P3.29@3741.97,3226.97 ; P3.29@3744.8,3190.2 cw(c3792.6,3142.4) 3792.6,3210 cw(c3792.6,3277.6) P3.29@3744.8,3229.8 ; v1@4724.85,3206.46 ccw(c4716.32,3197.93) 4716.32,3210 ccw(c4716.32,3222.07) v1@4724.85,3213.54
PC9: P3.28 U1.99 | length 1666.5
  Top Layer w4: v1@4681.55,3224 cw(c4681.55,3211.93) 4690.09,3220.46 cw(c4698.62,3229) v1@4686.55,3229 ; v1(4681.55,3229) U1.99@4784.98,3125.57 ; U1.99@4769.01,3139.21 ccw(c4763.38,3139.21) 4767.36,3143.19 ccw(c4771.34,3147.17) U1.99@4771.34,3141.54
  Bottom Layer w4: P3.28@3625,3110 3671.2,3156.2 ; P3.28@3625.39,3126 ccw(c3626.26,3161.54) 3651.4,3136.4 ccw(c3676.54,3111.26) P3.28@3641,3110.39 ; P3.28@3625.49,3129.99 ccw(c3626.57,3174.42) 3658,3143 ccw(c3689.42,3111.57) P3.28@3644.99,3110.49 ; P3.28@3625.59,3133.99 ccw(c3626.89,3187.3) 3664.6,3149.6 ccw(c3702.3,3111.89) P3.28@3648.99,3110.59 ; P3.28@3625.68,3137.99 ccw(c3627.2,3200.19) 3671.2,3156.2 ; P3.28@3652.99,3110.68 cw(c3715.19,3112.2) 3671.2,3156.2 ; v1@4678.01,3225.46 ccw(c4669.48,3216.93) 4669.48,3229 ccw(c4669.48,3241.07) v1@4678.01,3232.54 ; v1(4681.55,3229) 3768,3229 3749,3248 3703,3248 3671.2,3216.2 3671.2,3156.2
PC10: P3.23 U1.111 | length 1452.7
  Top Layer w4: U1.111@4687.55,2819.34 U1.111@4702,2833.79 ; v1@4696.07,2906.46 cw(c4683.21,2893.61) 4701.39,2893.61 ; U1.111@4699.54,2834.63 ccw(c4695.07,2839.1) 4701.39,2839.1 ; v1(4699.6,2910) 4701.39,2908.21 U1.111@4701.39,2834.4 ; U1.111@4701.39,2838.11 ccw(c4706.32,2838.11) U1.111@4702.84,2834.63 ; 4701.39,2902.25 cw(c4707.35,2902.25) v1@4703.14,2906.46
  Bottom Layer w4: P3.23@3725,2910 4033,2910 4034,2909 4069.42,2909 4070.42,2910 v1(4699.6,2910) ; P3.23@3736.31,2898.69 cw(c3763.63,2871.37) 3763.63,2910 cw(c3763.63,2948.63) P3.23@3736.31,2921.31 ; P3.23@3739.14,2895.86 cw(c3773.28,2861.72) 3773.28,2910 cw(c3773.28,2958.28) P3.23@3739.14,2924.14 ; P3.23@3741.97,2893.03 cw(c3782.94,2852.06) 3782.94,2910 cw(c3782.94,2967.94) P3.23@3741.97,2926.97 ; P3.23@3744.8,2890.2 cw(c3792.6,2842.4) 3792.6,2910 cw(c3792.6,2977.6) P3.23@3744.8,2929.8 ; v1@4696.07,2906.46 ccw(c4687.53,2897.93) 4687.53,2910 ccw(c4687.53,2922.07) v1@4696.07,2913.54
PC11: P3.22 U1.112 | length 1191.9
  Top Layer w4: v1(4667.05,2771) U1.112@4701.47,2805.42 ; v1@4667.05,2776 ccw(c4667.05,2788.07) 4675.58,2779.54 ccw(c4684.12,2771) v1@4672.05,2771 ; U1.112@4685.49,2791.78 cw(c4679.87,2791.78) 4683.85,2787.8 cw(c4687.82,2783.82) U1.112@4687.82,2789.45
  Bottom Layer w4: P3.22@3619.63,2782.52 cw(c3618.36,2776) 3625,2776 ; P3.22@3625,2810 3625,2776 ; P3.22@3630.37,2782.52 ccw(c3631.64,2776) 3625,2776 ; v1@4663.51,2767.46 ccw(c4654.97,2758.93) 4654.97,2771 ccw(c4654.97,2783.07) v1@4663.51,2774.54 ; v1(4667.05,2771) 3630,2771 3625,2776
PC12: P3.21 U1.113 | length 1491
  Top Layer w4: U1.113@4715.39,2791.5 4730,2806.12 4730,2852 v1(4734,2856) ; U1.113@4727.38,2806.79 ccw(c4721.05,2813.12) 4730,2813.12 ; 4730,2834.27 cw(c4755.73,2834.27) v1@4737.54,2852.46 ; 4730,2843.93 cw(c4746.07,2843.93) v1@4734.71,2855.29
  Bottom Layer w4: P3.21@3725,2810 4678,2810 4716,2848 4726,2848 ; P3.21@3736.31,2798.69 cw(c3763.63,2771.37) 3763.63,2810 cw(c3763.63,2848.63) P3.21@3736.31,2821.31 ; P3.21@3739.14,2795.86 cw(c3773.28,2761.72) 3773.28,2810 cw(c3773.28,2858.28) P3.21@3739.14,2824.14 ; P3.21@3741.97,2793.03 cw(c3782.94,2752.06) 3782.94,2810 cw(c3782.94,2867.94) P3.21@3741.97,2826.97 ; P3.21@3744.8,2790.2 cw(c3792.6,2742.4) 3792.6,2810 cw(c3792.6,2877.6) P3.21@3744.8,2829.8 ; v1@4729.01,2855.77 cw(c4718.72,2855.28) 4726,2848 ; v1@4733.77,2851.01 ccw(c4733.28,2840.72) 4726,2848 ; v1(4734,2856) 4726,2848
PC13: P1.33 P2.7 U1.7 | length 7419
  Top Layer w4: v1(5173,3142.98) 5173,2654.03 U1.7@5383.52,2443.52 ; U1.7@5367.54,2457.16 ccw(c5361.92,2457.16) 5365.9,2461.14 ccw(c5369.88,2465.11) U1.7@5369.88,2459.49 ; v1(6748,2273) 6757.53,2282.53 6757.53,4620.47 v1(6748,4630) ; v1@6748,2278 ccw(c6748,2290.07) 6756.54,2281.54 ccw(c6765.07,2273) v1@6753,2273 ; v1@6748,4625 cw(c6748,4612.93) 6756.54,4621.46 cw(c6765.07,4630) v1@6753,4630
  Bottom Layer w4: v1(5173,3142.98) 5571.85,3142.98 5574.81,3145.94 5780.94,3145.94 5785,3150 6430.09,3150 6493.09,3213 6568,3213 6601.24,3179.76 6601.24,3135.62 6630.85,3106 6730,3106 6748,3088 v1(6748,2273) P2.7@6640,2165 ; v1@5176.54,3139.45 cw(c5185.07,3130.91) 5185.07,3142.98 cw(c5185.07,3155.06) v1@5176.54,3146.52 ; P1.33@5920,4630 v1(6748,4630) ; P1.33@5931.31,4618.69 cw(c5958.63,4591.37) 5958.63,4630 cw(c5958.63,4668.63) P1.33@5931.31,4641.31 ; P1.33@5934.14,4615.86 cw(c5968.28,4581.72) 5968.28,4630 cw(c5968.28,4678.28) P1.33@5934.14,4644.14 ; P1.33@5936.97,4613.03 cw(c5977.94,4572.06) 5977.94,4630 cw(c5977.94,4687.94) P1.33@5936.97,4646.97 ; P1.33@5939.8,4610.2 cw(c5987.6,4562.4) 5987.6,4630 cw(c5987.6,4697.6) P1.33@5939.8,4649.8 ; P2.7@6640,2181 ccw(c6640,2219.63) 6667.31,2192.31 ccw(c6694.63,2165) P2.7@6656,2165 ; P2.7@6640,2185 ccw(c6640,2233.28) 6674.14,2199.14 ccw(c6708.28,2165) P2.7@6660,2165 ; P2.7@6640,2189 ccw(c6640,2246.94) 6680.97,2205.97 ccw(c6721.94,2165) P2.7@6664,2165 ; P2.7@6640,2193 ccw(c6640,2260.6) 6687.8,2212.8 ccw(c6735.6,2165) P2.7@6668,2165 ; v1@6743,2273 cw(c6730.93,2273) 6739.46,2264.46 cw(c6748,2255.93) v1@6748,2268 ; v1@6744.46,2276.54 ccw(c6735.93,2285.07) 6748,2285.07 ccw(c6760.07,2285.07) v1@6751.54,2276.54 ; v1@6744.46,4626.46 ccw(c6735.93,4617.93) 6735.93,4630 ccw(c6735.93,4642.07) v1@6744.46,4633.54
PC14: C4.2 U1.8 Y1.1 | length 1603.7
  Top Layer w4: U1.8@5397.44,2457.44 5776,2078.87 5776,1988 5792,1972 5977,1972 6046.82,2041.82 6046.82,2080 ; U1.8@5411.08,2441.46 cw(c5411.08,2435.84) 5415.06,2439.82 cw(c5419.03,2443.8) U1.8@5413.41,2443.8 ; C4.2@5907.99,2136.25 cw(c5907.99,2103.06) 5931.46,2126.53 cw(c5954.93,2150) C4.2@5921.74,2150 ; C4.2@5907.99,2140.25 cw(c5907.99,2116.72) 5924.63,2133.36 cw(c5941.27,2150) C4.2@5917.74,2150 ; C4.2@5907.99,2150 5932.86,2125.14 Y1.1@6017.17,2125.14 6019,2125.14 6019,2107.82 6046.82,2080 ; Y1.1@6002.69,2112.63 ccw(c5972.5,2082.44) 5972.5,2125.14 ccw(c5972.5,2167.83) Y1.1@6002.69,2137.64 ; Y1.1@6005.52,2115.46 ccw(c5982.16,2092.1) 5982.16,2125.14 ccw(c5982.16,2158.17) Y1.1@6005.52,2134.81 ; Y1.1@6008.35,2118.29 ccw(c5991.82,2101.75) 5991.82,2125.14 ccw(c5991.82,2148.52) Y1.1@6008.35,2131.98 ; Y1.1@6016.9,2125.75 ccw(c6038.17,2119.86) 6022.57,2104.25 ; Y1.1@6020.76,2124.69 ccw(c6045.77,2117.75) 6027.42,2099.4 ; Y1.1@6024.61,2123.62 ccw(c6053.36,2115.65) 6032.27,2094.55 ; Y1.1@6028.47,2122.55 ccw(c6060.96,2113.54) 6037.12,2089.7 ; Y1.1@6032.32,2121.48 ccw(c6068.55,2111.44) 6041.97,2084.85 ; Y1.1@6036.18,2120.41 ccw(c6076.15,2109.33) 6046.82,2080
PC15: C5.2 U1.9 Y1.2 | length 1311.4
  Top Layer w4: U1.9@5411.36,2471.36 5616.71,2266 5808,2266 5826,2284 5826,2299 5874,2299 5874,2122 5908,2088 C5.2@5907.99,2035 5935.14,2062.14 Y1.2@6017.17,2062.14 ; U1.9@5425,2455.38 cw(c5425,2449.76) 5428.98,2453.74 cw(c5432.95,2457.72) U1.9@5427.33,2457.72 ; C5.2@5898.27,2044.72 ccw(c5874.78,2068.21) 5908,2068.21 ; C5.2@5901.1,2041.89 ccw(c5884.44,2058.55) 5908,2058.55 ; C5.2@5907.99,2044.75 ccw(c5907.99,2068.28) 5924.63,2051.64 ccw(c5941.27,2035) C5.2@5917.74,2035 ; C5.2@5907.99,2048.75 ccw(c5907.99,2081.94) 5931.46,2058.47 ccw(c5954.93,2035) C5.2@5921.74,2035 ; 5908,2058.51 ccw(c5931.51,2058.51) C5.2@5914.88,2041.89 ; 5908,2068.17 ccw(c5941.16,2068.17) C5.2@5917.71,2044.72 ; Y1.2@6002.69,2049.64 ccw(c5972.5,2019.45) 5972.5,2062.14 ccw(c5972.5,2104.84) Y1.2@6002.69,2074.65 ; Y1.2@6005.52,2052.47 ccw(c5982.16,2029.11) 5982.16,2062.14 ccw(c5982.16,2095.18) Y1.2@6005.52,2071.82 ; Y1.2@6008.35,2055.3 ccw(c5991.82,2038.76) 5991.82,2062.14 ccw(c5991.82,2085.53) Y1.2@6008.35,2068.99
PD2: P3.20 U1.116 | length 1487.3
  Top Layer w4: v1@4538,2846 cw(c4538,2833.93) 4546.54,2842.46 cw(c4555.07,2851) v1@4543,2851 ; v1(4538,2851) 4657,2732 4739.4,2732 U1.116@4757.14,2749.74 ; 4727.97,2732 ccw(c4727.97,2751.64) U1.116@4741.85,2737.75 ; 4737.63,2732 ccw(c4737.63,2741.98) U1.116@4744.68,2734.92 ; U1.116@4741.17,2736.1 cw(c4735.55,2736.1) 4739.52,2732.12 cw(c4743.5,2728.15) U1.116@4743.5,2733.77
  Bottom Layer w4: P3.20@3618.11,2737.14 ccw(c3615.86,2746) 3625,2746 ; P3.20@3619.09,2733.26 ccw(c3617.16,2740.86) 3625,2740.86 ccw(c3632.84,2740.86) P3.20@3630.91,2733.26 ; P3.20@3625,2710 3625,2746 ; P3.20@3631.89,2737.14 cw(c3634.14,2746) 3625,2746 ; v1@4534.46,2847.46 ccw(c4525.93,2838.93) 4525.93,2851 ccw(c4525.93,2863.07) v1@4534.46,2854.54 ; v1(4538,2851) 3606,2851 3587,2832 3587,2784 3625,2746
PD3: P3.19 U1.117 | length 1437.2
  Top Layer w4: v1(4745.24,2710) U1.117@4771.06,2735.82 ; v1@4745.24,2715 ccw(c4745.24,2727.07) 4753.77,2718.54 ccw(c4762.31,2710) v1@4750.24,2710 ; U1.117@4755.09,2722.18 cw(c4749.46,2722.18) 4753.44,2718.2 cw(c4757.42,2714.23) U1.117@4757.42,2719.85
  Bottom Layer w4: P3.19@3725,2710 v1(4745.24,2710) ; P3.19@3736.31,2698.69 cw(c3763.63,2671.37) 3763.63,2710 cw(c3763.63,2748.63) P3.19@3736.31,2721.31 ; P3.19@3739.14,2695.86 cw(c3773.28,2661.72) 3773.28,2710 cw(c3773.28,2758.28) P3.19@3739.14,2724.14 ; P3.19@3741.97,2693.03 cw(c3782.94,2652.06) 3782.94,2710 cw(c3782.94,2767.94) P3.19@3741.97,2726.97 ; P3.19@3744.8,2690.2 cw(c3792.6,2642.4) 3792.6,2710 cw(c3792.6,2777.6) P3.19@3744.8,2729.8 ; v1@4741.7,2706.46 ccw(c4733.17,2697.93) 4733.17,2710 ccw(c4733.17,2722.07) v1@4741.7,2713.54
PE5: P2.5 U1.4 | length 2293.3
  Top Layer w4: U1.4@5341.76,2401.76 5509,2234.52 v1(5509,1760) ; U1.4@5355.4,2385.79 cw(c5355.4,2380.16) 5359.38,2384.14 cw(c5363.36,2388.12) U1.4@5357.73,2388.12 ; v1@5505.46,1763.54 ccw(c5496.93,1772.07) 5509,1772.07 ccw(c5521.07,1772.07) v1@5512.54,1763.54 ; v1@6604.06,1799.75 ccw(c6596.84,1800.84) 6602,1806 ; v1@6608.25,1803.94 cw(c6607.16,1811.16) 6602,1806 ; v1(6609,1799) 6602,1806 ; P2.5@6640,2065 6673,2065 ; P2.5@6667.63,2060.44 cw(c6673,2059.55) 6673,2065 ; P2.5@6667.63,2069.56 ccw(c6673,2070.45) 6673,2065 ; 6602,1806 6602,1881 6624,1903 6660,1903 6678,1921 6678,2060 6673,2065
  Bottom Layer w4: v1@5509,1755 cw(c5509,1742.93) 5517.54,1751.46 cw(c5526.07,1760) v1@5514,1760 ; v1(5509,1760) 5527,1742 6552,1742 v1(6609,1799) ; v1@6604,1799 cw(c6591.93,1799) 6600.46,1790.46 cw(c6609,1781.93) v1@6609,1794
PE6: P2.8 U1.5 | length 2097.5
  Top Layer w4: U1.5@5355.68,2415.68 5529,2242.36 v1(5529,1790) ; U1.5@5369.32,2399.71 cw(c5369.32,2394.08) 5373.3,2398.06 cw(c5377.28,2402.04) U1.5@5371.65,2402.04 ; v1@5525.46,1793.54 ccw(c5516.93,1802.07) 5529,1802.07 ccw(c5541.07,1802.07) v1@5532.54,1793.54 ; v1(6194,1774) 6447,2027 6560,2027 6578,2045 6578,2120 6560,2138 6540,2138 P2.8@6540,2165 ; v1@6194,1779 ccw(c6194,1791.07) 6202.54,1782.54 ccw(c6211.07,1774) v1@6199,1774
  Bottom Layer w4: v1@5529,1785 cw(c5529,1772.93) 5537.54,1781.46 cw(c5546.07,1790) v1@5534,1790 ; v1(5529,1790) 5545,1774 v1(6194,1774) ; v1@6190.46,1770.46 ccw(c6181.93,1761.93) 6181.93,1774 ccw(c6181.93,1786.07) v1@6190.46,1777.54
PF5: P2.13 U1.15 | length 1526.2
  Top Layer w4: U1.15@5479.58,2570.16 ccw(c5476.16,2573.58) U1.15@5481,2573.58 ; 5481,2574.7 ccw(c5487.42,2574.7) U1.15@5482.88,2570.16 ; U1.15@5494.87,2554.87 5481,2568.74 5481,2656 5502,2677 v1(5536,2677) ; v1@5532.46,2673.46 ccw(c5523.93,2664.93) 5523.93,2677 ccw(c5523.93,2689.07) v1@5532.46,2680.54
  Bottom Layer w4: v1@5536,2672 cw(c5536,2659.93) 5544.54,2668.46 cw(c5553.07,2677) v1@5541,2677 ; v1(5536,2677) 5560,2653 5560,2532 5665,2427 6592,2427 6605,2440 6640,2440 P2.13@6640,2465
PF6: D3.2 P2.16 U1.18 | length 5761.8
  Top Layer w4: D3.2@3878.32,1191.68 ccw(c3838.05,1231.95) 3895,1231.95 ccw(c3951.95,1231.95) D3.2@3911.68,1191.68 ; D3.2@3881.15,1188.85 ccw(c3847.7,1222.3) 3895,1222.3 ccw(c3942.3,1222.3) D3.2@3908.85,1188.85 ; D3.2@3883.98,1186.02 ccw(c3857.36,1212.64) 3895,1212.64 ccw(c3932.64,1212.64) D3.2@3906.02,1186.02 ; D3.2@3886.8,1183.2 ccw(c3867.02,1202.98) 3895,1202.98 ccw(c3922.98,1202.98) D3.2@3903.2,1183.2 ; D3.2@3895,1175 3895,1412 v1(4171,1688) ; v1@4166,1688 cw(c4153.93,1688) 4162.46,1679.46 cw(c4171,1670.93) v1@4171,1683 ; U1.18@5536.63,2596.63 5575.26,2558 v1(5651,2558) ; U1.18@5550.27,2580.66 cw(c5550.27,2575.03) 5554.25,2579.01 cw(c5558.23,2582.99) U1.18@5552.6,2582.99 ; v1@5647.46,2554.46 ccw(c5638.93,2545.93) 5638.93,2558 ccw(c5638.93,2570.07) v1@5647.46,2561.54 ; v1@6098.46,1715.54 ccw(c6089.93,1724.07) 6102,1724.07 ccw(c6114.07,1724.07) v1@6105.54,1715.54 ; v1(6102,1712) 6102,1899 6426,2223 6561,2223 6578,2240 6578,2527 ; P2.16@6540,2565 6578,2527 ; P2.16@6542.79,2549.25 cw(c6546.53,2528.11) 6561.71,2543.29 cw(c6576.89,2558.47) P2.16@6555.75,2562.21 ; P2.16@6543.49,2545.31 cw(c6548.17,2518.88) 6567.14,2537.86 cw(c6586.12,2556.83) P2.16@6559.69,2561.51 ; P2.16@6544.19,2541.37 cw(c6549.8,2509.66) 6572.57,2532.43 cw(c6595.34,2555.2) P2.16@6563.63,2560.81 ; P2.16@6544.88,2537.43 cw(c6551.43,2500.44) 6578,2527 ; P2.16@6567.57,2560.12 ccw(c6604.56,2553.57) 6578,2527
  Bottom Layer w4: v1(4171,1688) 5281,1688 5291,1678 6068,1678 v1(6102,1712) ; v1@4174.54,1684.46 cw(c4183.07,1675.93) 4183.07,1688 cw(c4183.07,1700.07) v1@4174.54,1691.54 ; v1(5651,2558) 6540,2558 P2.16@6540,2565 ; v1@5654.54,2554.46 cw(c5663.07,2545.93) 5663.07,2558 cw(c5663.07,2570.07) v1@5654.54,2561.54 ; v1@6097,1712 cw(c6084.93,1712) 6093.46,1703.46 cw(c6102,1694.93) v1@6102,1707 ; 6455.5,2558 ccw(c6455.5,2649.5) P2.16@6520.2,2584.8 ; 6465.16,2558 ccw(c6465.16,2639.84) P2.16@6523.03,2581.97 ; 6474.82,2558 ccw(c6474.82,2630.18) P2.16@6525.86,2579.14 ; 6484.47,2558 ccw(c6484.47,2620.53) P2.16@6528.69,2576.31 ; 6489.3,2558 cw(c6489.3,2514.3) P2.16@6520.2,2545.2 ; 6494.13,2558 ccw(c6494.13,2610.87) P2.16@6531.51,2573.49 ; 6498.96,2558 cw(c6498.96,2523.96) P2.16@6523.03,2548.03 ; 6503.79,2558 ccw(c6503.79,2601.21) P2.16@6534.34,2570.66 ; 6508.62,2558 cw(c6508.62,2533.62) P2.16@6525.86,2550.86
PF7: P2.15 U1.19 | length 1791.2
  Top Layer w4: v1(5520,2631) 5522,2629 5532.1,2629 ; v1@5523.54,2627.46 cw(c5527.24,2623.76) 5527.24,2629 ; v1@5524.33,2633.49 ccw(c5532.1,2637.96) 5532.1,2629 ; U1.19@5534.58,2624.19 ccw(c5528.95,2624.19) 5532.93,2628.17 ccw(c5536.91,2632.15) U1.19@5536.91,2626.52 ; U1.19@5550.55,2610.55 5532.1,2629
  Bottom Layer w4: v1@5516.46,2627.46 cw(c5507.93,2618.93) 5520,2618.93 cw(c5532.07,2618.93) v1@5523.54,2627.46 ; v1(5520,2631) 5520,2481 5588,2413 6644,2413 6678,2447 6678,2527 ; P2.15@6640,2565 6678,2527 ; P2.15@6642.79,2549.25 cw(c6646.53,2528.11) 6661.71,2543.29 cw(c6676.89,2558.47) P2.15@6655.75,2562.21 ; P2.15@6643.49,2545.31 cw(c6648.17,2518.88) 6667.14,2537.86 cw(c6686.12,2556.83) P2.15@6659.69,2561.51 ; P2.15@6644.19,2541.37 cw(c6649.8,2509.66) 6672.57,2532.43 cw(c6695.34,2555.2) P2.15@6663.63,2560.81 ; P2.15@6644.88,2537.43 cw(c6651.43,2500.44) 6678,2527 ; P2.15@6667.57,2560.12 ccw(c6704.56,2553.57) 6678,2527
PF8: P2.18 R16.1 U1.20 | length 3641.6
  Top Layer w4: v1@5536.15,2639 cw(c5536.15,2605.71) U1.20@5559.69,2629.25 ; v1@5536.15,2643 cw(c5536.15,2619.36) U1.20@5552.86,2636.08 ; v1(5536.15,2644) 5544.94,2644 ; v1@5536.15,2647 cw(c5536.15,2633.02) 5546.03,2642.91 ; v1@5540.44,2641.44 cw(c5544.94,2638.77) 5544.94,2644 ; v1@5540.44,2646.56 ccw(c5544.94,2649.23) 5544.94,2644 ; U1.20@5548.5,2638.11 ccw(c5542.87,2638.11) 5546.85,2642.09 ccw(c5550.83,2646.07) U1.20@5550.83,2640.44 ; U1.20@5564.47,2624.47 5544.94,2644 ; R16.1@6306.39,4248.09 cw(c6285.81,4245.2) 6300.5,4230.5 ; R16.1@6310.35,4248.64 cw(c6295.75,4246.59) 6306.17,4236.17 cw(c6316.59,4225.75) R16.1@6318.64,4240.35 ; R16.1@6318.09,4236.39 ccw(c6315.2,4215.81) 6300.5,4230.5 ; R16.1@6320,4250 6300.5,4230.5 ; P2.18@6512,2665 ccw(c6444.4,2665) 6492.2,2712.8 ccw(c6540,2760.6) P2.18@6540,2693 ; P2.18@6516,2665 ccw(c6458.06,2665) 6499.03,2705.97 ccw(c6540,2746.94) P2.18@6540,2689 ; P2.18@6520,2665 ccw(c6471.72,2665) 6505.86,2699.14 ccw(c6540,2733.28) P2.18@6540,2685 ; P2.18@6524,2665 ccw(c6485.37,2665) 6512.69,2692.31 ccw(c6540,2719.63) P2.18@6540,2681 ; P2.18@6540,2665 6300.5,2904.5 6300.5,4230.5
  Bottom Layer w4: v1@5531.15,2644 ccw(c5519.07,2644) 5527.61,2652.54 ccw(c5536.15,2661.07) v1@5536.15,2649 ; v1(5536.15,2644) 5521,2659.15 5521,2688 5529,2696 5563,2696 5594,2665 P2.18@6540,2665 ; P2.18@6520.2,2645.2 ccw(c6472.4,2597.4) 6472.4,2665 ccw(c6472.4,2732.6) P2.18@6520.2,2684.8 ; P2.18@6523.03,2648.03 ccw(c6482.06,2607.06) 6482.06,2665 ccw(c6482.06,2722.94) P2.18@6523.03,2681.97 ; P2.18@6525.86,2650.86 ccw(c6491.72,2616.72) 6491.72,2665 ccw(c6491.72,2713.28) P2.18@6525.86,2679.14 ; P2.18@6528.69,2653.69 ccw(c6501.37,2626.37) 6501.37,2665 ccw(c6501.37,2703.63) P2.18@6528.69,2676.31
PF9: D4.2 P2.17 U1.21 | length 5961.7
  Top Layer w4: D4.2@4153.32,1191.68 ccw(c4113.05,1231.95) 4170,1231.95 ccw(c4226.95,1231.95) D4.2@4186.68,1191.68 ; D4.2@4156.15,1188.85 ccw(c4122.7,1222.3) 4170,1222.3 ccw(c4217.3,1222.3) D4.2@4183.85,1188.85 ; D4.2@4158.98,1186.02 ccw(c4132.36,1212.64) 4170,1212.64 ccw(c4207.64,1212.64) D4.2@4181.02,1186.02 ; D4.2@4161.8,1183.2 ccw(c4142.02,1202.98) 4170,1202.98 ccw(c4197.98,1202.98) D4.2@4178.2,1183.2 ; v1@4166.46,1265.46 cw(c4157.93,1256.93) 4170,1256.93 cw(c4182.07,1256.93) v1@4173.54,1265.46 ; D4.2@4170,1175 v1(4170,1269) ; U1.21@5578.39,2638.39 5592.78,2624 5757.81,2624 v1(5836.81,2703) ; U1.21@5593.68,2626.4 ccw(c5599.46,2632.18) 5599.46,2624 ; v1@5831.81,2703 cw(c5819.73,2703) 5828.27,2694.46 cw(c5836.81,2685.93) v1@5836.81,2698 ; v1@6729.46,2568.46 cw(c6720.93,2559.93) 6733,2559.93 cw(c6745.07,2559.93) v1@6736.54,2568.46 ; v1(6733,2572) 6733,2119 6799,2053 v1(6799,1465) ; v1@6795.46,1468.54 ccw(c6786.93,1477.07) 6799,1477.07 ccw(c6811.07,1477.07) v1@6802.54,1468.54
  Bottom Layer w4: v1(4170,1269) 4293,1392 6726,1392 v1(6799,1465) ; v1@4170,1274 ccw(c4170,1286.07) 4178.54,1277.54 ccw(c4187.07,1269) v1@4175,1269 ; v1(5836.81,2703) 6580,2703 6589,2694 6640,2694 P2.17@6640,2665 v1(6733,2572) ; v1@5840.34,2699.46 cw(c5848.88,2690.93) 5848.88,2703 cw(c5848.88,2715.07) v1@5840.34,2706.54 ; P2.17@6640,2637 cw(c6640,2569.4) 6687.8,2617.2 cw(c6735.6,2665) P2.17@6668,2665 ; P2.17@6640,2641 cw(c6640,2583.06) 6680.97,2624.03 cw(c6721.94,2665) P2.17@6664,2665 ; P2.17@6640,2645 cw(c6640,2596.72) 6674.14,2630.86 cw(c6708.28,2665) P2.17@6660,2665 ; P2.17@6640,2649 cw(c6640,2610.37) 6667.31,2637.69 cw(c6694.63,2665) P2.17@6656,2665 ; v1@6728,2572 ccw(c6715.93,2572) 6724.46,2580.54 ccw(c6733,2589.07) v1@6733,2577 ; v1@6794,1465 cw(c6781.93,1465) 6790.46,1456.46 cw(c6799,1447.93) v1@6799,1460
PF10: D5.2 P2.20 U1.22 | length 6389.7
  Top Layer w4: D5.2@4428.32,1191.68 ccw(c4388.05,1231.95) 4445,1231.95 ccw(c4501.95,1231.95) D5.2@4461.68,1191.68 ; D5.2@4431.15,1188.85 ccw(c4397.7,1222.3) 4445,1222.3 ccw(c4492.3,1222.3) D5.2@4458.85,1188.85 ; D5.2@4433.98,1186.02 ccw(c4407.36,1212.64) 4445,1212.64 ccw(c4482.64,1212.64) D5.2@4456.02,1186.02 ; D5.2@4436.8,1183.2 ccw(c4417.02,1202.98) 4445,1202.98 ccw(c4472.98,1202.98) D5.2@4453.2,1183.2 ; D5.2@4445,1175 4445,1358 v1(4661,1574) ; v1@4656,1574 cw(c4643.93,1574) 4652.46,1565.46 cw(c4661,1556.93) v1@4661,1569 ; 5575,2670.77 ccw(c5583.49,2670.77) U1.22@5577.49,2664.77 ; 5575,2680.43 ccw(c5593.15,2680.43) U1.22@5580.32,2667.6 ; U1.22@5576.34,2666.09 ccw(c5571.74,2666.36) 5575,2669.62 ; U1.22@5578.53,2668.28 cw(c5578.26,2672.87) 5575,2669.62 ; U1.22@5592.31,2652.31 5575,2669.62 ; v1@5596,3097 cw(c5583.93,3097) 5592.46,3088.46 cw(c5601,3079.93) v1@5601,3092 ; v1(5601,3097) 5540,3036 5540,2739 5575,2704 5575,2669.62 ; v1@6424.46,3118.46 cw(c6415.93,3109.93) 6428,3109.93 cw(c6440.07,3109.93) v1@6431.54,3118.46 ; v1(6428,3122) 6428,2922 6540,2810 ; P2.20@6527.63,2790.12 ccw(c6517.84,2810) 6540,2810 ; P2.20@6529.4,2786.53 ccw(c6521.01,2803.57) 6540,2803.57 ccw(c6558.99,2803.57) P2.20@6550.6,2786.53 ; P2.20@6531.16,2782.94 ccw(c6524.17,2797.14) 6540,2797.14 ccw(c6555.83,2797.14) P2.20@6548.84,2782.94 ; P2.20@6540,2765 6540,2810 ; P2.20@6552.37,2790.12 cw(c6562.16,2810) 6540,2810 ; v1@6694.46,1832.54 ccw(c6685.93,1841.07) 6698,1841.07 ccw(c6710.07,1841.07) v1@6701.54,1832.54 ; v1(6698,1829) 6698,2789 v1(6713,2804) ; v1@6708,2804 cw(c6695.93,2804) 6704.46,2795.46 cw(c6713,2786.93) v1@6713,2799
  Bottom Layer w4: v1(4661,1574) 4759,1672 5238,1672 5244,1666 6535,1666 v1(6698,1829) ; v1@4661,1579 ccw(c4661,1591.07) 4669.54,1582.54 ccw(c4678.07,1574) v1@4666,1574 ; v1(5601,3097) 5627,3123 6427,3123 v1(6428,3122) ; v1@5601,3102 ccw(c5601,3114.07) 5609.54,3105.54 ccw(c5618.07,3097) v1@5606,3097 ; 6413.51,3123 cw(c6413.51,3107.51) v1@6424.46,3118.46 ; 6418.34,3123 ccw(c6418.34,3131.66) v1@6424.46,3125.54 ; P2.20@6540,2765 6579,2804 ; P2.20@6542.46,2780.81 ccw(c6545.99,2803.57) 6562.28,2787.28 ccw(c6578.57,2770.99) P2.20@6555.81,2767.46 ; P2.20@6543.07,2784.76 ccw(c6547.49,2813.22) 6567.86,2792.86 ccw(c6588.22,2772.49) P2.20@6559.76,2768.07 ; P2.20@6543.69,2788.72 ccw(c6548.99,2822.86) 6573.43,2798.43 ccw(c6597.86,2773.99) P2.20@6563.72,2768.69 ; P2.20@6544.3,2792.67 ccw(c6550.49,2832.51) 6579,2804 ; P2.20@6567.67,2769.3 cw(c6607.51,2775.49) 6579,2804 ; v1@6693,1829 cw(c6680.93,1829) 6689.46,1820.46 cw(c6698,1811.93) v1@6698,1824 ; v1@6709.46,2800.46 ccw(c6700.93,2791.93) 6700.93,2804 ccw(c6700.93,2816.07) v1@6709.46,2807.54 ; v1(6713,2804) 6579,2804